# EAGLE board Fonte (EAGLE 9.6.2)
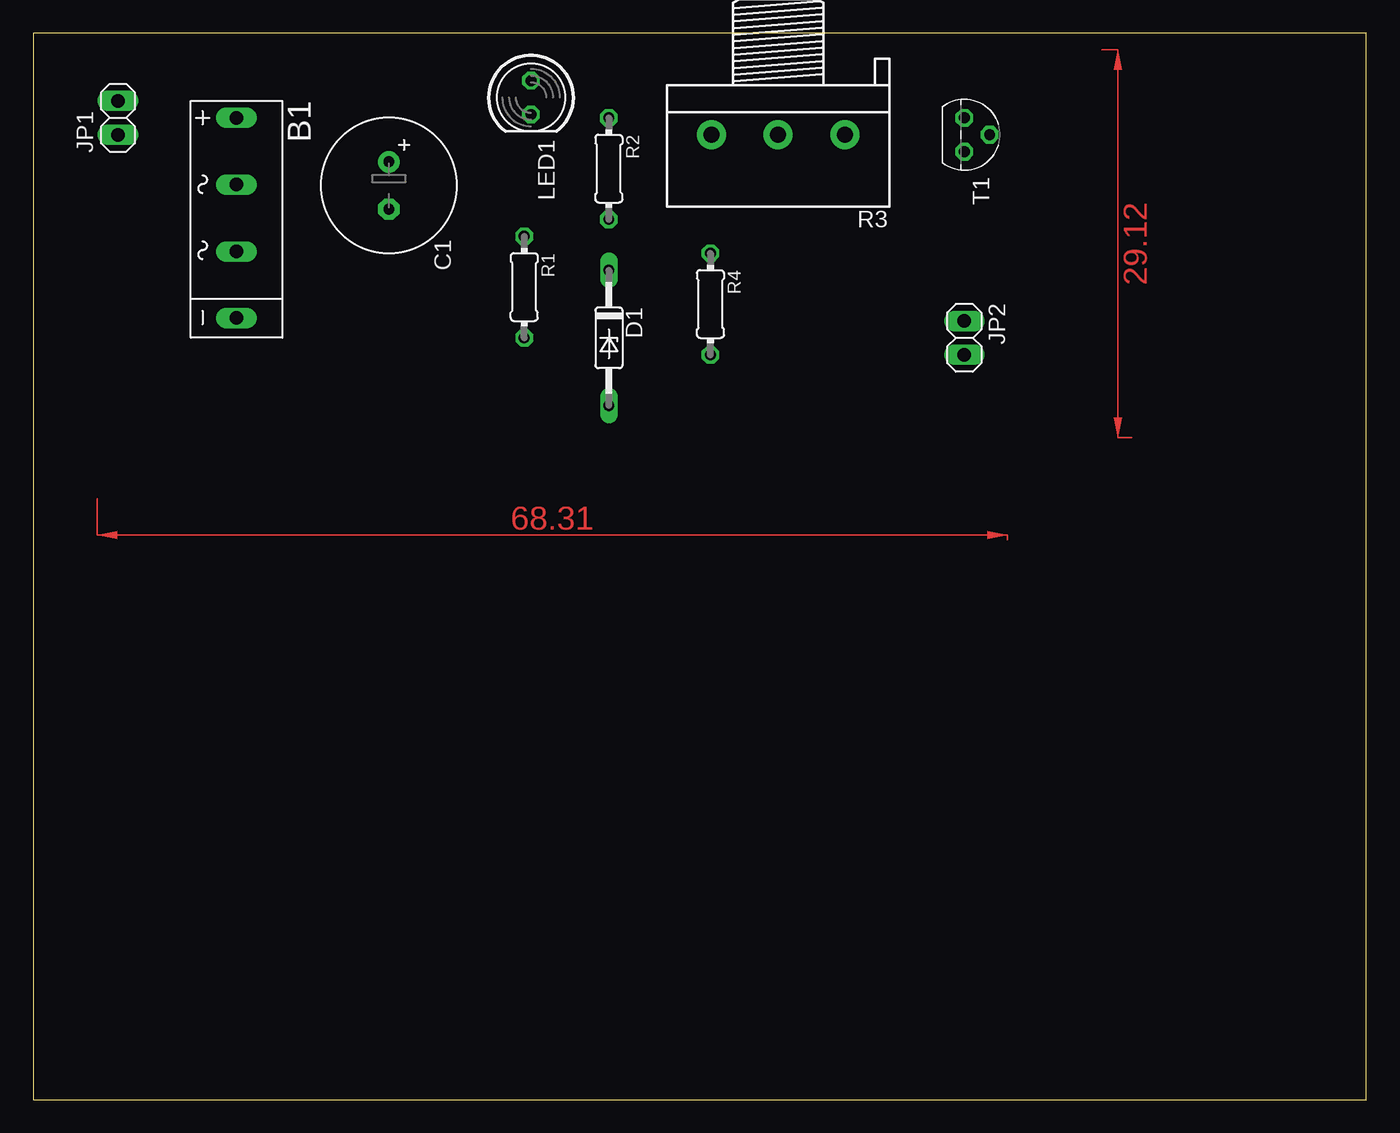
[diagram p0: board, top side]
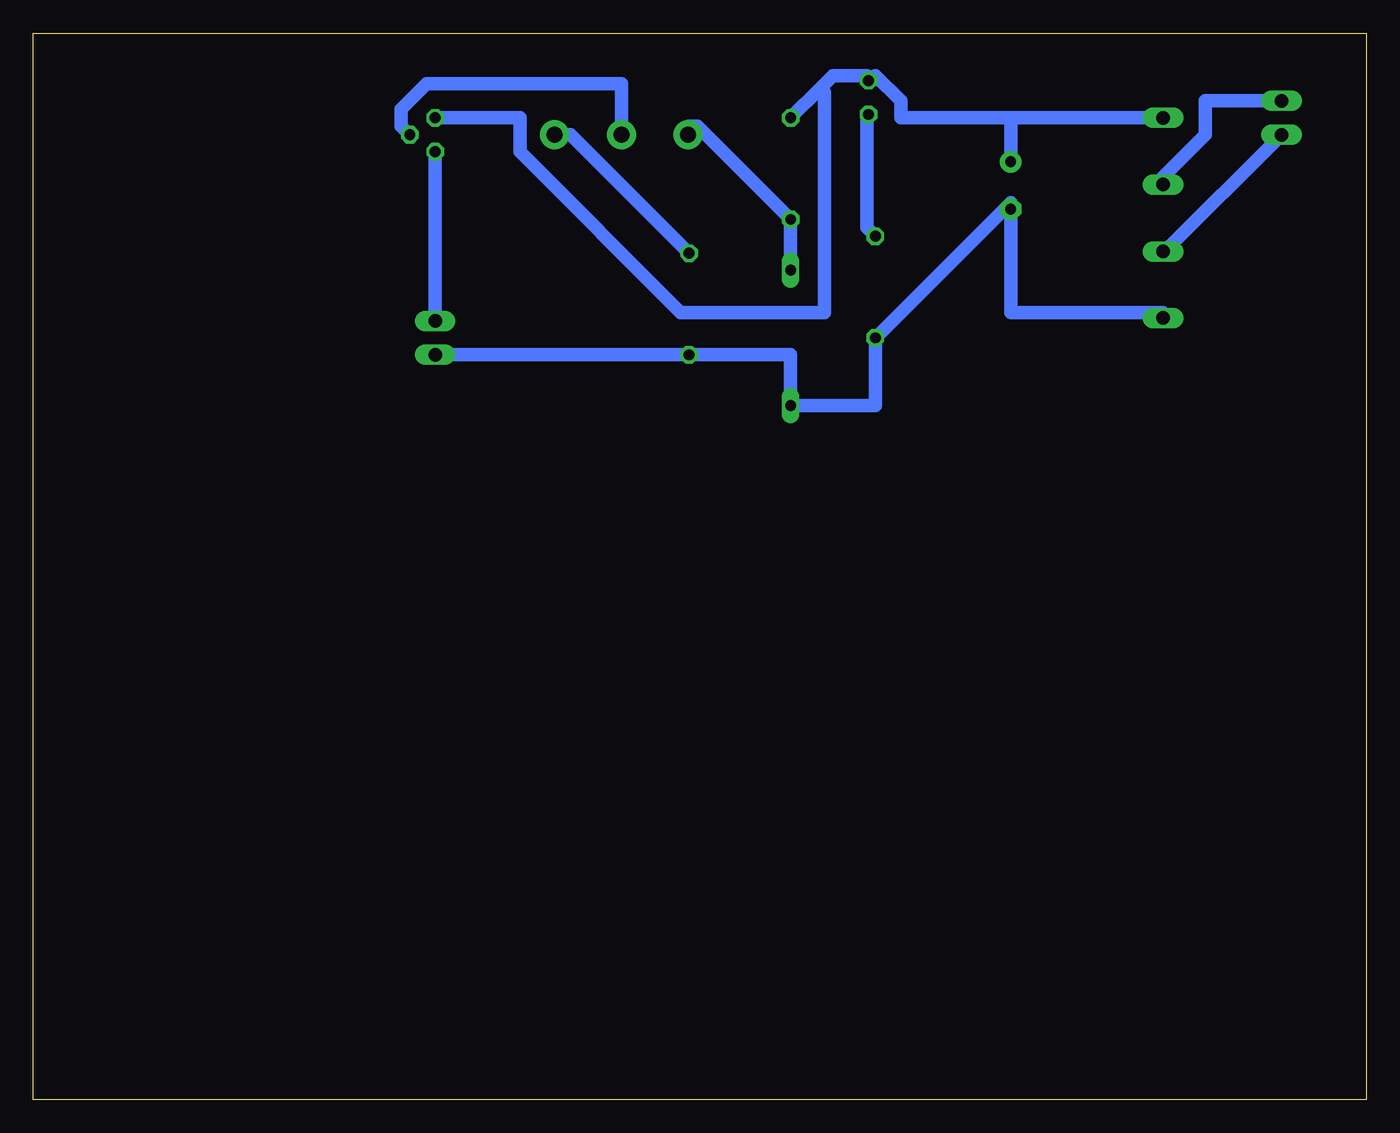
[diagram p1: board, bottom side, seen from below]

Size 100 x 80 mm. Coordinates in mm from the lower left corner, seen from the top.
Outline: 0,0 100,0 100,80 0,80 0,0
Copper layers (1*16): Top 0.035mm / dielectric 1.5mm / Bottom 0.035mm
Design rules "default *": minimum track width 40mil, minimum drill 0.35mm, track to track 40mil, track to pad 40mil, pad to pad 40mil, via to via 40mil, smd to smd 6mil, copper to edge 40mil, drill to drill 6mil, minimum pad ring 10mil, minimum via ring 8mil, stop-mask expansion 4mil, vias tented up to drill 0mil, thermal gap 10mil

## Footprints (pad centres in the part's own frame; a part is rotated, then mirrored left to right if it is on the bottom)
2KBB-R = drill 1.016 long: + -7.62,0; - 7.391,0; AC1 -2.616,0; AC2 2.413,0
E3,5-10 = drill 0.813 pad 1.6: + -1.778,0 | drill 0.813 pad 1.6 octagon: - 1.778,0
DO35Z10 = drill 0.813 long: A 5.08,0; C -5.08,0
1X02 = drill 1.016 long: 1 -1.27,0; 2 1.27,0
LED5MM = drill 0.813 octagon: A -1.27,0; K 1.27,0
0204/7 = drill 0.813 octagon: 1 -3.81,0; 2 3.81,0
3RP/1610N = drill 1.2 pad 2.184: 1 -5,0; 2 0,0; 3 5,0
TO92 = drill 0.813 octagon: 1 1.27,0; 2 0,1.905; 3 -1.27,0

## Placement (x,y rotation side)
B1  [2KBB-R]  15.24,66.04 270 top
C1  560µ  [E3,5-10]  26.67,68.58 270 top
D1  BZX55  [DO35Z10]  43.18,57.15 270 top
JP1  [1X02]  6.35,73.66 90 top
JP2  [1X02]  69.85,57.15 270 top
LED1  [LED5MM]  37.34,75.18 270 top
R1  1.2k  [0204/7]  36.83,60.96 270 top
R2  1.2k  [0204/7]  43.18,69.85 270 top
R3  10k  [3RP/1610N]  55.88,72.39 180 top
R4  5.6k  [0204/7]  50.8,59.69 270 top
T1  BC337  [TO92]  69.85,72.39 270 top

## Library data of the parts
B1 = rectifier
C1 = rcl; SPICEPREFIX: C
D1 = diode
JP1 JP2 = pinhead
LED1 = led
R1 R2 R4 = rcl; SPICEPREFIX: R
R3 = pot
T1 = transistor

## Nets
N$1: B1.AC1 JP1.2
N$2: B1.AC2 JP1.1
N$3: D1.C R2.2 R3.3
N$4: B1.- C1.- D1.A JP2.2 R1.2 R4.2
N$5: R3.1 R4.1
N$6: B1.+ C1.+ LED1.A R2.1 T1.3
N$7: LED1.K R1.1
N$9: R3.2 T1.2
N$12: JP2.1 T1.1

## Tracks (layer width: path | path; a pad name or v marks a point on that pad's centre or on a via)
N$1
  Bottom 1.016: JP1.2 12.06,74.93 12.06,72.39 15.24,69.22 B1.AC1
N$2
  Bottom 1.016: JP1.1 15.24,63.5 B1.AC2
N$3
  Bottom 1.016: D1.C R2.2 50.16,73.03 50.8,73.03 50.8,72.39 R3.3
N$4
  Bottom 1.016: JP2.2 R4.2 43.18,55.88 D1.A 36.83,52.07 R1.2 26.67,67.31 C1.- 26.67,59.05 15.24,59.05 B1.-
N$5
  Bottom 1.016: R4.1 59.69,72.39 R3.1
N$6
  Bottom 1.016: 26.67,73.66 B1.+ | C1.+ 26.67,73.66 | 40.96,75.88 40.01,76.83 37.47,76.83 LED1.A 36.83,76.83 34.92,74.93 34.92,73.66 26.67,73.66 | 40.96,75.88 R2.1 | T1.3 63.5,73.66 63.5,71.12 51.44,59.05 40.64,59.05 40.64,75.56 40.96,75.88
N$7
  Bottom 1.016: R1.1 37.47,65.41 37.47,73.66 LED1.K
N$9
  Bottom 1.016: T1.2 72.39,73.03 72.39,74.3 70.48,76.2 55.88,76.2 R3.2
N$12
  Bottom 1.016: JP2.1 T1.1
(copper drawn outside any net)
  shapes: Top area x2